# EAGLE board Paint (1 Lamp) (EAGLE 9.7.0)

Size 120.27 x 101.59 mm. Coordinates in mm from the lower left corner, seen from the top.
Outline: 0,0 120.27,0 120.27,101.59 0,101.59 0,0
Copper layers (1*16): Top 0.035mm / dielectric 1.5mm / Bottom 0.035mm
Design rules "default": minimum track width 6mil, minimum drill 0.35mm, track to track 6mil, track to pad 6mil, pad to pad 6mil, via to via 6mil, smd to smd 6mil, copper to edge 40mil, drill to drill 6mil, minimum pad ring 10mil, minimum via ring 8mil, stop-mask expansion 4mil, vias tented up to drill 0mil, thermal gap 10mil

## Footprints (pad centres in the part's own frame; a part is rotated, then mirrored left to right if it is on the bottom)
LED-RGB-5MM = drill 0.9: B 0.635,0.635; C -0.635,-0.635; G 1.905,-0.635; R -1.905,0.635
1X08 = drill 1.016 long: 1 -8.89,0; 2 -6.35,0; 3 -3.81,0; 4 -1.27,0; 5 1.27,0; 6 3.81,0; 7 6.35,0; 8 8.89,0
RESAD1016W63L850D250B = drill 0.83 pad 1.43: 1 -5.08,0; 2 5.08,0
ARDUINO-UNO-R3-SHIELD = drill 1.016 pad 1.88: 3.3V 24.13,-2.54; 5V 24.13,0; A0 24.13,12.7; A1 24.13,15.24; A2 24.13,17.78; A3 24.13,20.32; A4 24.13,22.86; A5 24.13,25.4; AREF -24.13,-13.97; D2 -24.13,20.32; D3 -24.13,17.78; D4 -24.13,15.24; D5 -24.13,12.7; D6 -24.13,10.16; D7 -24.13,7.62; D8 -24.13,3.81; D9 -24.13,1.27; D10 -24.13,-1.27; D11 -24.13,-3.81; D12 -24.13,-6.35; D13 -24.13,-8.89; GND@0 24.13,2.54; GND@1 24.13,5.08; GND@2 -24.13,-11.43; IOREF 24.13,-7.62; NC 24.13,-10.16; RES 24.13,-5.08; RX -24.13,25.4; SCL -24.13,-19.05; SDA -24.13,-16.51; TX -24.13,22.86; VIN 24.13,7.62

## Placement (x,y rotation side)
D6  LED-RGBRCBG-PTH  [LED-RGB-5MM]  35.23,94.1 0 top
KEYPAD1  KEYPAD-4X4  [1X08]  106.94,81.04 0 top
R1  0.15k  [RESAD1016W63L850D250B]  31.42,83.94 90 top
R2  0.15k  [RESAD1016W63L850D250B]  36.5,83.94 90 top
R3  0.15k  [RESAD1016W63L850D250B]  39.04,83.94 90 top
U1  ARDUINO-UNO-R3-SHIELD  [ARDUINO-UNO-R3-SHIELD]  47.88,29.84 270 top

## Library data of the parts
D6 KEYPAD1 R1-R3 U1 = Tinkercad

## Nets
D6_B: D6.B R2.2
D6_G: D6.G R3.2
D6_R: D6.R R1.2
U1_D2: KEYPAD1.8 U1.D2
U1_D3: KEYPAD1.7 U1.D3
U1_D4: KEYPAD1.6 U1.D4
U1_D5: KEYPAD1.5 U1.D5
U1_D6: KEYPAD1.4 U1.D6
U1_D7: KEYPAD1.3 U1.D7
U1_D8: KEYPAD1.2 U1.D8
U1_D9: KEYPAD1.1 U1.D9
U1_D10: R3.1 U1.D10
U1_D11: R2.1 U1.D11
U1_D12: R1.1 U1.D12
U1_GND: D6.C U1.GND@0 U1.GND@1 U1.GND@2

## Tracks (layer width: path | path; a pad name or v marks a point on that pad's centre or on a via)
D6_B  (1 unrouted)
D6_G  (1 unrouted)
D6_R  (1 unrouted)
U1_D2  (1 unrouted)
U1_D3  (1 unrouted)
U1_D4  (1 unrouted)
U1_D5  (1 unrouted)
U1_D6  (1 unrouted)
U1_D7  (1 unrouted)
U1_D8  (1 unrouted)
U1_D9  (1 unrouted)
U1_D10  (1 unrouted)
U1_D11  (1 unrouted)
U1_D12  (1 unrouted)
U1_GND  (3 unrouted)